# Altium PCB NIXIEclockhis.PcbDoc (part 2 of 3)
Units mil, origin at the board's own origin, x right, y up, seen from the top; angles counter-clockwise.
Board outline 8475 x 2960 mil, 2 copper layers (Top Layer, Bottom Layer); 232 components, 292 nets, 854 pads, 247 vias.
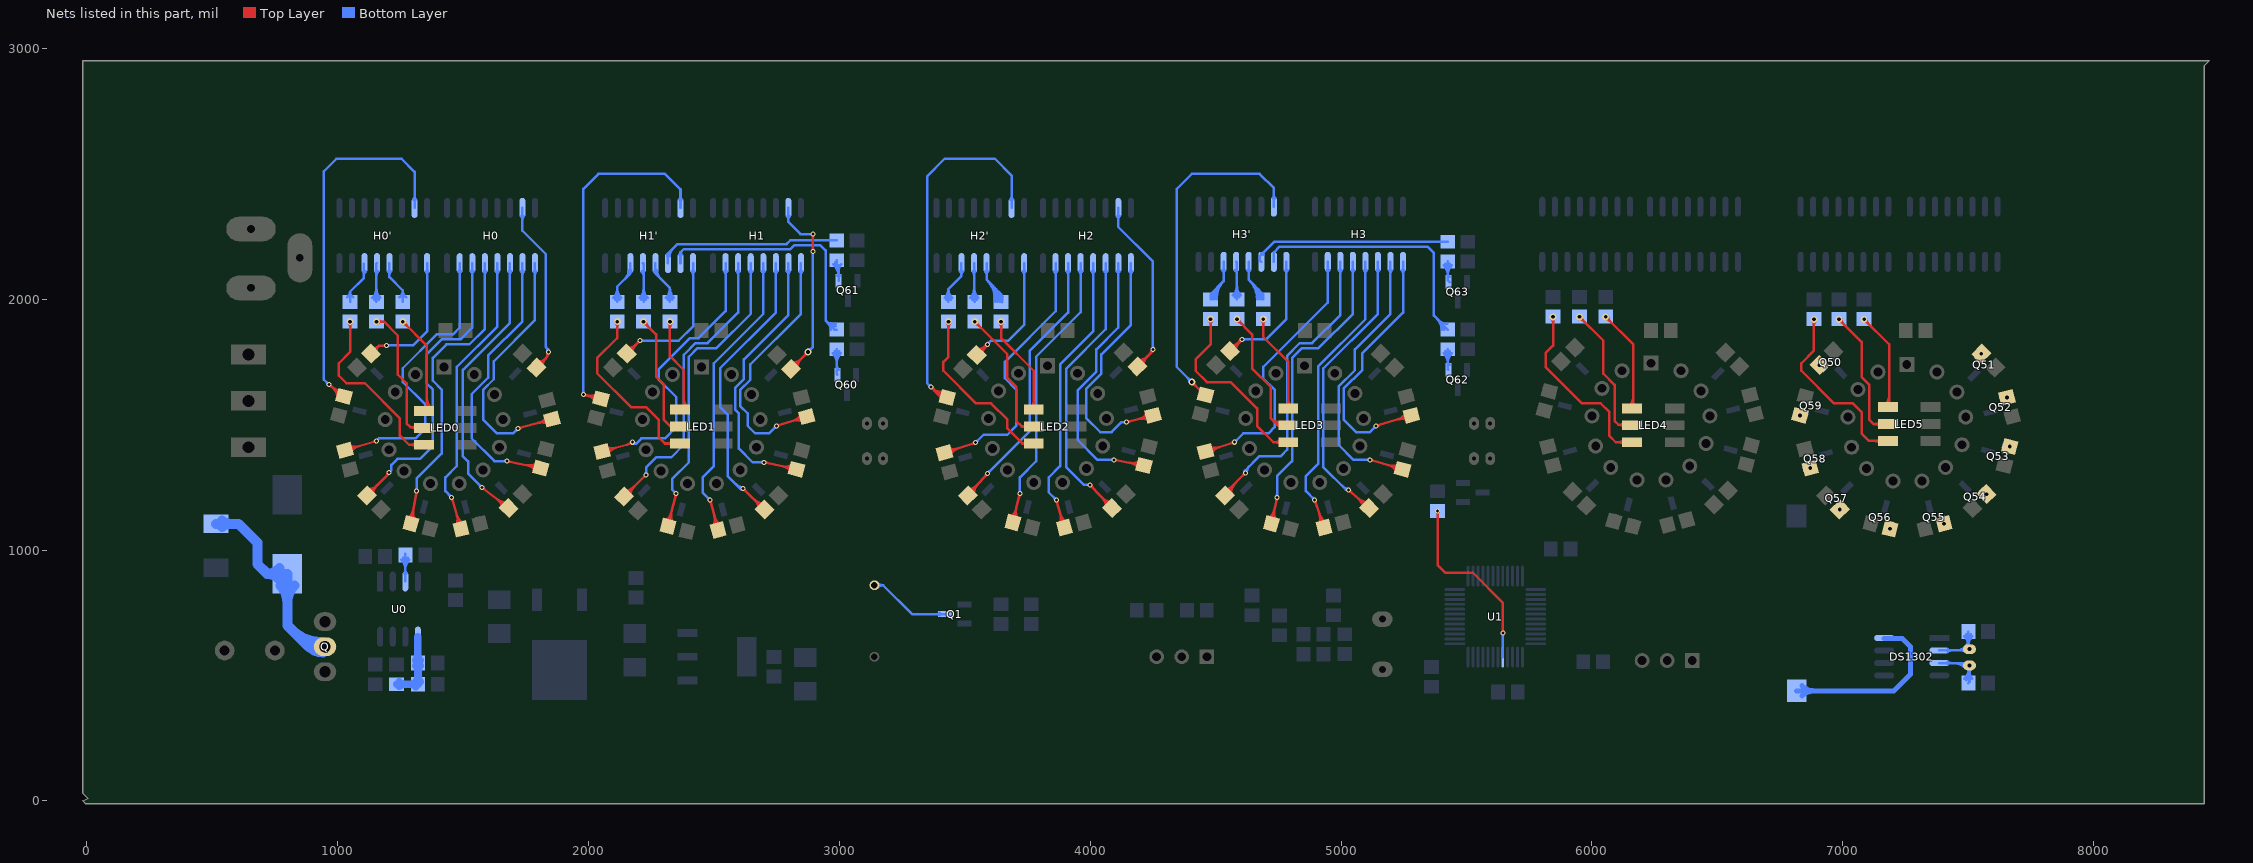
[diagram p2: the nets of this part, all layers, seen from the top]

## Via types
v1: diameter 20, hole 12, Top Layer to Bottom Layer, 132 vias
v2: diameter 28, hole 15, Top Layer to Bottom Layer, 84 vias
v3: diameter 30, hole 20, Top Layer to Bottom Layer, 23 vias
v4: diameter 118.11, hole 118.11, Top Layer to Bottom Layer, 4 vias
v5: diameter 50, hole 28, Top Layer to Bottom Layer, 2 vias
v6: diameter 59.06, hole 59.06, Top Layer to Bottom Layer, 2 vias

## Nets (pads, with @x,y where several pads share a name; then routed paths per layer and width w, separated by ;. In a path a pad name is that pad's centre, name@x,y a point inside that pad or via, vN(x,y) a via of type N, cw(c..) or ccw(c..) an arc to the next point about the centre after c; other vN are vias at no path point) (continued)
H5.0: Q50.2 R119.2
  other v2: 6907.16,1737.16
H5.1: Q51.2 R118.1
  other v2: 7552.16,1782.84
H5.2: Q52.2 R111.2
  other v2: 7654.81,1608.03
H5.3: Q53.2 R112.2
  other v2: 7665.19,1413.03
H5.4: Q54.2 R113.2
  other v2: 7572.84,1222.84
H5.5: Q55.2 R114.2
  other v2: 7403.03,1105.19
H5.6: Q56.2 R115.2
  other v2: 7188.03,1084.81
H5.7: Q57.2 R116.2
  other v2: 6987.84,1162.16
H5.8: Q58.2 R117.2
  other v2: 6870.19,1326.97
H5.9: Q59.2 R124.1
  other v2: 6829.81,1536.97
LED0.B: LED0.1 R51.2 | length 521.9
  Top Layer w10: v2@1260,1901.63 cw(c1260,1879.9) 1275.36,1895.27 cw(c1290.73,1910.63) v2@1269,1910.63 ; v2(1260,1910.63) 1355,1815.63 1355,1565 LED0.1@1345,1555 ; 1355,1589.69 ccw(c1399.38,1589.69) LED0.1@1368,1558.31 ; 1355,1613.83 ccw(c1423.52,1613.83) LED0.1@1375.07,1565.38
LED0.G: LED0.3 R53.2 | length 818.2
  Top Layer w10: v2@1043.64,1904.27 cw(c1028.27,1888.9) 1050,1888.9 cw(c1071.73,1888.9) v2@1056.36,1904.27 ; v2(1050,1910.63) 1050,1790 1005,1745 1005,1695 1035,1665 1108.64,1665 1248.64,1525 1248.64,1456.36 1285,1420 LED0.3@1345,1420 ; LED0.3@1314.93,1409.62 ccw(c1289.86,1384.55) 1289.86,1420 ccw(c1289.86,1455.45) LED0.3@1314.93,1430.38
LED0.R: LED0.2 R52.2 | length 628.9
  Top Layer w10: v2(1155,1910.63) 1184.37,1910.63 1240,1855 1240,1700 1275,1665 1275,1505 1290,1490 ; v2@1161.36,1904.27 cw(c1176.73,1888.9) 1176.73,1910.63 cw(c1176.73,1932.36) v2@1161.36,1916.99 ; 1295.9,1490 ccw(c1295.9,1516.92) LED0.2@1314.93,1497.88 ; LED0.2@1313.76,1478.44 ccw(c1290,1459.81) 1290,1490 ; LED0.2@1342.5,1490 1290,1490
LED1.B: LED1.1 R66.2 | length 490.9
  Top Layer w10: v2@2318.64,1904.27 cw(c2303.27,1888.9) 2325,1888.9 cw(c2346.73,1888.9) v2@2331.36,1904.27 ; v2(2325,1910.63) 2325,1773.64 2380,1718.64 2380,1575 LED1.1@2365,1560 ; LED1.1@2374.3,1570.38 ccw(c2360.54,1584.14) 2380,1584.14 ; 2380,1582.62 ccw(c2407.31,1582.62) LED1.1@2388,1563.31 ; 2380,1606.76 ccw(c2431.45,1606.76) LED1.1@2395.07,1570.38
LED1.G: LED1.3 R68.2 | length 816.5
  Top Layer w10: v2@2108.64,1904.27 cw(c2093.27,1888.9) 2115,1888.9 cw(c2136.73,1888.9) v2@2121.36,1904.27 ; v2@2114.37,1910 v2(2115,1910.63) 2115,1845 2035,1765 2035,1705 2170,1570 2230,1570 2280,1520 2280,1450 2305,1425 LED1.3@2365,1425 ; LED1.3@2334.93,1414.62 ccw(c2309.86,1389.55) 2309.86,1425 ccw(c2309.86,1460.45) LED1.3@2334.93,1435.38
LED1.R: LED1.2 R67.2 | length 534.3
  Top Layer w10: v2@2220,1901.63 cw(c2220,1881.42) 2234.29,1895.71 ; v2(2220,1910.63) 2220,1910 2270,1860 2270,1691.36 2300,1661.36 2300,1520 2327.5,1492.5 LED1.2@2365,1492.5 ; v2@2229,1910.63 ccw(c2252.25,1910.63) 2235.81,1894.19
LED2.B: LED2.1 R79.2 | length 494.3
  Top Layer w10: v2@3638.64,1904.27 cw(c3623.27,1888.9) 3645,1888.9 cw(c3666.73,1888.9) v2@3651.36,1904.27 ; v2(3645,1910.63) 3645,1845 3775,1715 LED2.1@3775,1560 ; LED2.1@3764.62,1570.38 ccw(c3739.55,1595.45) 3775,1595.45 ccw(c3810.45,1595.45) LED2.1@3785.38,1570.38
LED2.G: LED2.3 R81.2 | length 769.1
  Top Layer w10: v2@3428.64,1904.27 cw(c3413.27,1888.9) 3435,1888.9 cw(c3456.73,1888.9) v2@3441.36,1904.27 ; v2(3435,1910.63) 3435,1770 3415,1750 3415,1715 3545,1585 3605,1585 3670,1520 3670,1485 3730,1425 ; LED2.3@3742.57,1417.71 ccw(c3730,1410.52) 3730,1425 ; LED2.3@3742.57,1432.29 cw(c3730,1439.48) 3730,1425 ; LED2.3@3775,1425 3730,1425
LED2.R: LED2.2 R80.2 | length 614.3
  Top Layer w10: v2@3540,1901.63 cw(c3540,1879.9) 3555.36,1895.27 cw(c3570.73,1910.63) v2@3549,1910.63 ; v2(3540,1910.63) 3670,1780.63 3670,1686.36 3705,1651.36 3705,1515 3727.5,1492.5 ; LED2.2@3743.19,1484.22 ccw(c3727.5,1473.5) 3727.5,1492.5 ; LED2.2@3743.19,1500.78 cw(c3727.5,1511.5) 3727.5,1492.5 ; LED2.2@3775,1492.5 3727.5,1492.5
LED3.B: LED3.1 R94.2 | length 486.9
  Top Layer w10: v2@4683.64,1914.27 cw(c4668.27,1898.9) 4690,1898.9 cw(c4711.73,1898.9) v2@4696.36,1914.27 ; v2(4690,1920.63) 4690,1850 4790,1750 LED3.1@4790,1565 ; LED3.1@4779.62,1575.38 ccw(c4754.55,1600.45) 4790,1600.45 ccw(c4825.45,1600.45) LED3.1@4800.38,1575.38
LED3.G: LED3.3 R96.2 | length 849.4
  Top Layer w10: v2@4473.64,1914.27 cw(c4458.27,1898.9) 4480,1898.9 cw(c4501.73,1898.9) v2@4486.36,1914.27 ; v2(4480,1920.63) 4480,1820 4420,1760 4420,1715 4465,1670 4560,1670 4665,1565 4665,1495 4730,1430 LED3.3@4790,1430 ; LED3.3@4759.93,1419.62 ccw(c4734.86,1394.55) 4734.86,1430 ccw(c4734.86,1465.45) LED3.3@4759.93,1440.38
LED3.R: LED3.2 R95.2 | length 710
  Top Layer w10: v2@4585,1911.63 cw(c4585,1889.9) 4600.36,1905.27 cw(c4615.73,1920.63) v2@4594,1920.63 ; v2(4585,1920.63) 4645.63,1860 4645.63,1724.37 4720,1650 4720,1525 ; 4732.63,1512.37 ccw(c4760.13,1539.88) LED3.2@4769.22,1502.06 ; 4745.25,1499.75 ccw(c4765.02,1519.52) LED3.2@4771.56,1492.33 ; LED3.2@4756.95,1491.42 ccw(c4747.5,1487.12) 4747.5,1497.5 ; LED3.2@4756.95,1503.58 cw(c4747.5,1507.88) 4747.5,1497.5 ; LED3.2@4766.88,1511.78 cw(c4755.24,1560.24) 4720,1525 ; LED3.2@4790,1497.5 4747.5,1497.5 ; 4720,1525 4747.5,1497.5
LED4.B: LED4.1 R107.2 | length 524.7
  Top Layer w10: v2@6055,1921 cw(c6055,1899.27) 6070.36,1914.64 cw(c6085.73,1930) v2@6064,1930 ; v2(6055,1930) 6165,1820 6165,1570 LED4.1@6160,1565 ; LED4.1@6149.62,1575.38 ccw(c6112.48,1612.52) 6165,1612.52 ; LED4.1@6156.69,1568.31 ccw(c6136.62,1588.38) 6165,1588.38 ccw(c6183.38,1588.38) LED4.1@6170.38,1575.38
LED4.G: LED4.3 R109.2 | length 827.2
  Top Layer w10: v2@5838.64,1923.64 cw(c5823.27,1908.27) 5845,1908.27 cw(c5866.73,1908.27) v2@5851.36,1923.64 ; v2(5845,1930) 5845,1815 5815,1785 5815,1730 5960,1585 6035,1585 6070,1550 6070,1455 6095,1430 LED4.3@6160,1430 ; LED4.3@6129.93,1419.62 ccw(c6104.86,1394.55) 6104.86,1430 ccw(c6104.86,1465.45) LED4.3@6129.93,1440.38
LED4.R: LED4.2 R108.2 | length 632.9
  Top Layer w10: v2@5950,1921 cw(c5950,1899.27) 5965.36,1914.64 cw(c5980.73,1930) v2@5959,1930 ; v2(5950,1930) 6045,1835 6045,1703.64 6090,1658.64 6090,1515 6105,1500 ; 6110.9,1500 ccw(c6110.9,1526.92) LED4.2@6129.93,1507.88 ; LED4.2@6128.76,1488.44 ccw(c6105,1469.81) 6105,1500 ; LED4.2@6160,1497.5 6157.5,1500 6105,1500
LED5.B: LED5.1 R121.2 | length 505.6
  Top Layer w10: v2@7085,1911 cw(c7085,1889.27) 7100.36,1904.64 cw(c7115.73,1920) v2@7094,1920 ; v2(7085,1920) 7185,1820 7185,1575 LED5.1@7180,1570 ; LED5.1@7169.62,1580.38 ccw(c7132.48,1617.52) 7185,1617.52 ; LED5.1@7176.69,1573.31 ccw(c7156.62,1593.38) 7185,1593.38 ccw(c7203.38,1593.38) LED5.1@7190.38,1580.38
LED5.G: LED5.3 R123.2 | length 826.3
  Top Layer w10: v2@6878.64,1913.64 cw(c6863.27,1898.27) 6885,1898.27 cw(c6906.73,1898.27) v2@6891.36,1913.64 ; v2(6885,1920) 6885,1795 6835,1745 6835,1715 6965,1585 7040,1585 7075,1550 7075,1465 7105,1435 LED5.3@7180,1435 ; LED5.3@7149.93,1424.62 ccw(c7124.86,1399.55) 7124.86,1435 ccw(c7124.86,1470.45) LED5.3@7149.93,1445.38
LED5.R: LED5.2 R122.2 | length 621.8
  Top Layer w10: v2@6985,1911 cw(c6985,1889.27) 7000.36,1904.64 cw(c7015.73,1920) v2@6994,1920 ; v2(6985,1920) 7075,1830 7075,1690 7105,1660 7105,1520 7122.5,1502.5 LED5.2@7180,1502.5 ; LED5.2@7149.93,1492.12 ccw(c7124.86,1467.05) 7124.86,1502.5 ccw(c7124.86,1537.95) LED5.2@7149.93,1512.88
LEDBREATH: R140.2 U1.41 | length 811.3
  Top Layer w10: v1@5381.46,1152.09 cw(c5372.93,1143.56) 5385,1143.56 cw(c5397.07,1143.56) v1@5388.54,1152.09 ; v1(5385,1155.63) 5385,940 5415,910 5525,910 5645,790 v1(5645,670) ; v1@5641.46,673.54 ccw(c5632.93,682.07) 5645,682.07 ccw(c5657.07,682.07) v1@5648.54,673.54
  Bottom Layer w10: v1@5641.46,666.46 cw(c5634.07,659.07) 5644.53,659.07 ; U1.41@5644.53,573.58 5644.53,669.53 v1(5645,670) ; 5644.53,656.79 cw(c5658.21,656.79) v1@5648.54,666.46
NEON.0: Q60.2 R64.2 | length 256.4
  Bottom Layer w10: R64.2@2974.05,1784.68 cw(c2935.54,1746.17) 2990,1746.17 cw(c3044.46,1746.17) R64.2@3005.95,1784.68 ; R64.2@2981.12,1791.75 cw(c2959.68,1770.31) 2990,1770.31 cw(c3020.32,1770.31) R64.2@2998.88,1791.75 ; 2990,1736.85 ccw(c3015.31,1736.85) Q60.2@2997.41,1718.95 ; R64.2@2990,1800.63 2990,1700.98 Q60.2@2992.6,1698.39
NEON.1: Q61.2 R65.2 | length 256.4
  Bottom Layer w10: R65.2@2976.02,2139.68 cw(c2923.91,2087.58) Q61.2@2997.6,2087.58 ; R65.2@2983.09,2146.75 cw(c2948.06,2111.72) 2997.6,2111.72 ; R65.2@2990,2155.63 2990,2135 2997.6,2127.4 Q61.2@2997.6,2073.39 ; R65.2@2991.5,2133.08 cw(c2991.37,2126.85) 2997.6,2126.85 cw(c3007.97,2126.85) R65.2@3002.93,2135.91 ; Q61.2@2992.78,2093.95 ccw(c2981.16,2105.58) 2997.6,2105.58 ccw(c3014.04,2105.58) Q61.2@3002.41,2093.95 ; 2997.6,2114.76 cw(c3032.84,2114.76) R65.2@3007.92,2139.68
NEON.2: Q62.2 R92.2 | length 236.4
  Bottom Layer w10: R92.2@5409.05,1784.68 cw(c5370.54,1746.17) 5425,1746.17 cw(c5479.46,1746.17) R92.2@5440.95,1784.68 ; R92.2@5416.12,1791.75 cw(c5394.68,1770.31) 5425,1770.31 cw(c5455.32,1770.31) R92.2@5433.88,1791.75 ; 5425,1756.85 ccw(c5450.31,1756.85) Q62.2@5432.41,1738.95 ; R92.2@5425,1800.63 5425,1720.98 Q62.2@5427.6,1718.39
NEON.3: Q63.2 R93.2 | length 238.4
  Bottom Layer w10: R93.2@5409.05,2134.68 cw(c5370.54,2096.17) 5425,2096.17 cw(c5479.46,2096.17) R93.2@5440.95,2134.68 ; R93.2@5416.12,2141.75 cw(c5394.68,2120.31) 5425,2120.31 cw(c5455.32,2120.31) R93.2@5433.88,2141.75 ; 5425,2106.85 ccw(c5450.31,2106.85) Q63.2@5432.41,2088.95 ; R93.2@5425,2150.63 5425,2075.98 Q63.2@5432.6,2068.39
NetBEEP_2: BEEP.2 Q1.1 | length 409.7
  Bottom Layer w10: BEEP.2@3140,860 3175,860 ; BEEP.2@3150.48,849.71 cw(c3175,825.64) 3175,860 ; BEEP.2@3150.48,870.29 ccw(c3175,894.36) 3175,860 ; Q1.1@3401.05,740.18 ccw(c3389.42,728.56) 3389.42,745 ccw(c3389.42,761.44) Q1.1@3401.05,749.82 ; Q1.1@3421.61,745 3290,745 3175,860
NetBT0_1: BT0.1 DS1302.8 | length 821.3
  Bottom Layer w20: BT0.1@6815.98,439.21 7204.21,439.21 7270,505 7270,615 7237,648 DS1302.8@7165,648 ; BT0.1@6836.75,418.44 cw(c6886.89,368.31) 6886.89,439.21 cw(c6886.89,510.12) BT0.1@6836.75,459.98
NetC11_1: C11.1 U0.3 | length 270
  Bottom Layer w10: C11.1@1254.68,962.08 cw(c1217.69,925.09) 1270,925.09 ; C11.1@1261.75,969.15 cw(c1241.83,949.23) 1270,949.23 ; U0.3@1265.05,907.95 ccw(c1253.1,919.9) 1270,919.9 ccw(c1286.9,919.9) U0.3@1274.95,907.95 ; U0.3@1270,875 1270,984.37 C11.1@1270.63,985 ; 1270,922.05 cw(c1326.61,922.05) C11.1@1286.58,962.08 ; 1270,946.19 cw(c1302.47,946.19) C11.1@1279.51,969.15
NetC12_2: C12.2 R11.1 R12.2 U0.5 | length 512.5
  Bottom Layer w30: R11.1@1235.63,465 R12.2@1320.63,465 C12.2@1320.63,550 ; R11.1@1245.85,456.75 cw(c1265.77,436.83) 1265.77,465 ; R11.1@1245.85,474.51 ccw(c1268.81,497.47) 1268.81,465 ; R12.2@1311.75,456.12 ccw(c1290.31,434.68) 1290.31,465 ccw(c1290.31,495.32) R12.2@1311.75,473.88 ; R12.2@1311.75,475.85 ccw(c1290.31,497.29) 1320.63,497.29 ccw(c1350.95,497.29) R12.2@1329.51,475.85 ; C12.2@1311.75,539.15 cw(c1290.31,517.71) 1320.63,517.71 cw(c1350.95,517.71) C12.2@1329.51,539.15 ; C12.2@1311.75,560.85 ccw(c1291.83,580.77) 1320,580.77 ; C12.2@1320,550.63 U0.5@1320,655 ; 1320,583.81 ccw(c1352.47,583.81) C12.2@1329.51,560.85
NetC60_1: C60.1 DS1302.3 Y2.2 | length 487.6
  Bottom Layer w10: DS1302.3@7385,550 7495.43,550 Y2.2@7505,540.43 7505,474.37 C60.1@7500.63,470 ; DS1302.3@7417.95,545.05 cw(c7429.9,533.1) 7429.9,550 cw(c7429.9,566.9) DS1302.3@7417.95,554.95 ; 7440.55,550 cw(c7440.55,481.88) Y2.2@7488.71,530.05 ; 7464.69,550 cw(c7464.69,506.03) Y2.2@7495.78,537.12 ; C60.1@7484.68,487.92 ccw(c7435.62,536.98) Y2.2@7505,536.98 ; C60.1@7491.75,480.85 ccw(c7459.76,512.84) 7505,512.84 ; Y2.2@7494.62,530.05 cw(c7469.55,504.98) 7505,504.98 cw(c7540.45,504.98) Y2.2@7515.38,530.05 ; 7505,515.88 ccw(c7544.54,515.88) C60.1@7516.58,487.92
NetC61_1: C61.1 DS1302.2 Y2.1 | length 484
  Bottom Layer w10: DS1302.2@7385,600 Y2.1@7505,600 ; DS1302.2@7417.95,595.05 cw(c7429.9,583.1) 7429.9,600 cw(c7429.9,616.9) DS1302.2@7417.95,604.95 ; 7451.57,600 ccw(c7451.57,652.52) 7488.71,615.38 ccw(c7459.93,644.16) 7500.63,644.16 ; C61.1@7484.68,657.08 cw(c7446.17,618.57) 7500.63,618.57 cw(c7555.09,618.57) C61.1@7516.58,657.08 ; Y2.1@7488.71,594.62 ccw(c7475.71,581.62) 7475.71,600 ccw(c7475.71,628.38) Y2.1@7495.78,608.31 ; C61.1@7491.75,664.15 cw(c7470.31,642.71) 7500.63,642.71 cw(c7530.95,642.71) C61.1@7509.51,664.15 ; Y2.1@7500.63,604.37 C61.1@7500.63,675 ; 7500.63,636.75 ccw(c7530.84,636.75) Y2.1@7509.48,615.38
NetD0_3: D0.1 L0.1 Q.2 | length 1411.8
  Bottom Layer w40: D0.1@515,1105 605,1105 680,1030 680,945 719.5,905.5 ; D0.1@539.87,1092.63 cw(c569.75,1062.75) 569.75,1105 cw(c569.75,1147.25) D0.1@539.87,1117.37 ; L0.1@769.18,881.36 ccw(c719.5,842.31) 719.5,905.5 ; L0.1@769.18,929.64 cw(c719.5,968.69) 719.5,905.5 ; L0.1@772.27,858.2 cw(c705.6,791.53) 799.88,791.53 cw(c894.17,791.53) L0.1@827.5,858.2 ; 814.47,685.53 ccw(c942.5,813.57) Q.2@942.5,632.5 ; 882.75,617.25 ccw(c942.5,677) Q.2@942.5,592.5 ; Q.2@930.13,602.63 ccw(c900.25,572.75) 900.25,615 ccw(c900.25,657.25) Q.2@930.13,627.37 ; Q.2@950,615 885,615 799.88,700.12 L0.1@799.88,905.5 719.5,905.5
NetH0'_1: H0'.1 R48.1 | length 657.4
  Top Layer w10: R48.1@1132.84,1782.84 1165,1815 ; R48.1@1135.89,1805.19 ccw(c1140.56,1839.44) 1165,1815 ; R48.1@1155.19,1785.89 cw(c1189.44,1790.56) 1165,1815 ; v1@1191.46,1811.46 ccw(c1182.93,1802.93) 1182.93,1815 ccw(c1182.93,1827.07) v1@1191.46,1818.54 ; v1(1195,1815) 1165,1815
  Bottom Layer w10: v1@1195,1817.5 1302.5,1817.5 1357,1872 H0'.1@1357,2144 ; v1@1198.54,1811.46 cw(c1213.11,1796.89) 1213.11,1817.5 ; H0'.1@1352.05,2111.05 cw(c1340.1,2099.1) 1357,2099.1 cw(c1373.9,2099.1) H0'.1@1361.95,2111.05
NetH0'_4: H0'.4 R51.1 | length 267.2
  Bottom Layer w10: H0'.4@1202.05,2111.05 cw(c1190.1,2099.1) 1207,2099.1 cw(c1223.9,2099.1) H0'.4@1211.95,2111.05 ; H0'.4@1207,2144 1207,2088 1260,2035 ; R51.1@1246.3,2007.3 ccw(c1225.14,2035) 1260,2035 ; R51.1@1260,1989.37 1260,2035 ; R51.1@1273.7,2007.3 cw(c1294.86,2035) 1260,2035
NetH0'_5: H0'.5 R52.1 | length 315.2
  Bottom Layer w10: R52.1@1139.05,2005.32 ccw(c1100.54,2043.83) 1155,2043.83 ccw(c1209.46,2043.83) R52.1@1170.95,2005.32 ; R52.1@1146.12,1998.25 ccw(c1124.68,2019.69) 1155,2019.69 ccw(c1185.32,2019.69) R52.1@1163.88,1998.25 ; H0'.5@1152.05,2111.05 cw(c1144.93,2103.93) 1155,2103.93 ; R52.1@1155,1989.37 1155,2142 H0'.5@1157,2144 ; 1155,2094.27 cw(c1178.73,2094.27) H0'.5@1161.95,2111.05
NetH0'_6: H0'.6 R53.1 | length 253.3
  Bottom Layer w10: R53.1@1038.07,2008.52 ccw(c1024.69,2030) 1050,2030 ; R53.1@1050,1989.37 1050,2030 ; R53.1@1061.93,2008.52 cw(c1075.31,2030) 1050,2030 ; H0'.6@1102.05,2111.05 cw(c1094.93,2103.93) 1105,2103.93 ; 1105,2094.27 cw(c1128.73,2094.27) H0'.6@1111.95,2111.05 ; H0'.6@1105,2142 1105,2085 1050,2030
NetH0'_15: H0'.15 R54.2 | length 1680.5
  Top Layer w10: v1(965,1660) R54.2@1025.19,1613.03 ; v1@965.61,1655.04 cw(c967.09,1643.06) 974.52,1652.57 cw(c981.94,1662.09) v1@969.96,1660.61 ; 979.36,1648.79 cw(c944.24,1603.79) R54.2@1000.9,1610.78 ; 982.29,1646.51 ccw(c1014.18,1687.38) R54.2@1020.53,1635.93 ; 998.4,1633.94 cw(c978.13,1607.97) R54.2@1010.82,1612 ; R54.2@1001.32,1631.66 ccw(c1018.36,1653.49) R54.2@1021.75,1626
  Bottom Layer w10: v1@960,1660 ccw(c947.93,1660) 956.46,1668.54 ccw(c965,1677.07) v1@965,1665 ; v1(965,1660) 945,1680 945,2510 995,2560 1255,2560 1307,2508 H0'.15@1307,2364 ; H0'.15@1302.05,2396.95 ccw(c1290.1,2408.9) 1307,2408.9 ccw(c1323.9,2408.9) H0'.15@1311.95,2396.95
NetH0_1: H0.1 R40.1 | length 1218.6
  Top Layer w10: v1(1720,1485) R40.1@1855.19,1521.97 ; v1@1722.48,1489.34 ccw(c1728.46,1499.83) 1731.64,1488.18 ccw(c1734.83,1476.54) v1@1724.34,1482.52 ; 1800.73,1507.08 ccw(c1786.36,1559.65) R40.1@1833.69,1532.64 ; 1800.78,1507.09 cw(c1815.14,1454.59) R40.1@1842.11,1501.87 ; 1824.02,1513.45 ccw(c1816.01,1542.73) R40.1@1842.38,1527.69 ; 1824.07,1513.46 cw(c1832.06,1484.25) R40.1@1847.07,1510.55
  Bottom Layer w10: v1@1715,1485 cw(c1702.93,1485) 1711.46,1476.46 cw(c1720,1467.93) v1@1720,1480 ; v1(1720,1485) 1700,1465 1635,1465 1580,1520 1580,1638.64 1622.5,1681.14 1622.5,1752.5 1787,1917 H0.1@1787,2144 ; H0.1@1782.05,2111.05 cw(c1770.1,2099.1) 1787,2099.1 cw(c1803.9,2099.1) H0.1@1791.95,2111.05
NetH0_2: H0.2 R41.1 | length 1295.3
  Top Layer w10: v1(1675,1355) R41.1@1809.81,1326.97 ; v1@1677.74,1350.82 cw(c1684.36,1340.72) 1686.82,1352.54 cw(c1689.28,1364.36) v1@1679.18,1357.74 ; 1754.3,1338.51 ccw(c1765.46,1392.21) R41.1@1795.54,1346.35 ; 1754.83,1338.4 cw(c1743.82,1285.45) R41.1@1789.04,1315.11 ; 1777.94,1333.6 ccw(c1784.19,1363.66) R41.1@1801.02,1337.98 ; 1778.47,1333.49 cw(c1772.37,1304.18) R41.1@1797.41,1320.59
  Bottom Layer w10: v1@1671.46,1351.46 ccw(c1662.93,1342.93) 1662.93,1355 ccw(c1662.93,1367.07) v1@1671.46,1358.54 ; v1(1675,1355) 1625,1355 1535,1445 1535,1621.92 1600,1686.92 1600,1775 1737,1912 H0.2@1737,2144 ; H0.2@1732.05,2111.05 cw(c1720.1,2099.1) 1737,2099.1 cw(c1753.9,2099.1) H0.2@1741.95,2111.05
NetH0_3: H0.3 R42.1 | length 1335.6
  Top Layer w10: v1(1575,1250) R42.1@1682.16,1167.16 ; v1@1575.63,1245.04 cw(c1577.17,1233.07) 1584.55,1242.62 cw(c1591.93,1252.17) v1@1579.96,1250.63 ; 1637.05,1202.03 ccw(c1670.88,1245.8) R42.1@1677.9,1190.93 ; 1638,1201.3 cw(c1605.22,1158.88) R42.1@1658.39,1165.69 ; 1656.15,1187.27 ccw(c1675.22,1211.93) R42.1@1679.17,1181.01 ; 1657.11,1186.53 cw(c1639.08,1163.22) R42.1@1668.31,1166.96
  Bottom Layer w10: v1@1570,1250 ccw(c1557.93,1250) 1566.46,1258.54 ccw(c1575,1267.07) v1@1575,1255 ; v1(1575,1250) 1520,1305 1520,1353.64 1500,1373.64 1500,1718.64 1687,1905.64 H0.3@1687,2144 ; H0.3@1682.05,2111.05 cw(c1670.1,2099.1) 1687,2099.1 cw(c1703.9,2099.1) H0.3@1691.95,2111.05
NetH0_4: H0.4 R43.1 | length 1358.3
  Top Layer w10: v1@1452.61,1205.61 cw(c1446.84,1195) 1458.42,1198.42 cw(c1470,1201.84) v1@1459.39,1207.61 ; v1(1455,1210) R43.1@1491.97,1084.81 ; R43.1@1471.65,1097.49 ccw(c1423.95,1123.44) 1476.02,1138.81 ; 1475.95,1139.05 ccw(c1528.35,1154.52) R43.1@1502.24,1106.53 ; R43.1@1480.43,1092.71 ccw(c1453.95,1107.12) 1482.86,1115.66 ; 1482.79,1115.89 ccw(c1512.03,1124.53) R43.1@1497.46,1097.74
  Bottom Layer w10: v1@1450,1210 ccw(c1437.93,1210) 1446.46,1218.54 ccw(c1455,1227.07) v1@1455,1215 ; v1(1455,1210) 1430,1235 1430,1290 1475,1335 1475,1730 1637,1892 H0.4@1637,2144 ; H0.4@1632.05,2111.05 cw(c1620.1,2099.1) 1637,2099.1 cw(c1653.9,2099.1) H0.4@1641.95,2111.05
NetH0_5: H0.5 R44.1 | length 1433.6
  Top Layer w10: R44.1@1279.56,1125.58 ccw(c1248.7,1169.75) 1301.76,1160.34 ; R44.1@1285.29,1117.39 ccw(c1268.25,1141.77) 1297.54,1136.57 ; R44.1@1291.97,1105.19 v1(1315,1235) ; 1297.68,1137.38 ccw(c1328.11,1131.98) R44.1@1302.78,1114.28 ; 1301.9,1161.15 ccw(c1356.09,1151.53) R44.1@1310.97,1120.01 ; v1@1310.9,1232.14 cw(c1301.01,1225.22) 1312.89,1223.11 cw(c1324.78,1221.01) v1@1317.86,1230.9
  Bottom Layer w10: v1@1311.46,1238.54 ccw(c1302.93,1247.07) 1315,1247.07 ccw(c1327.07,1247.07) v1@1318.54,1238.54 ; v1(1315,1235) 1315,1285 1415,1385 1415,1640 1380,1675 1380,1766.21 1433.79,1820 1525,1820 1587,1882 H0.5@1587,2144 ; H0.5@1582.05,2111.05 cw(c1570.1,2099.1) 1587,2099.1 cw(c1603.9,2099.1) H0.5@1591.95,2111.05
NetH0_6: H0.6 R45.1 | length 1394.8
  Top Layer w10: R45.1@1117.16,1217.84 1205,1305.68 v1(1205,1310) ; R45.1@1118.55,1231.79 ccw(c1118.55,1262.11) 1139.99,1240.67 ccw(c1161.43,1219.23) R45.1@1131.11,1219.23 ; R45.1@1118.55,1241.79 ccw(c1118.55,1296.25) 1157.06,1257.74 ccw(c1195.57,1219.23) R45.1@1141.11,1219.23 ; 1193.41,1294.09 ccw(c1177.49,1310) v1@1200,1310
  Bottom Layer w10: v1(1205,1310) 1215,1320 1215,1340 1238.64,1363.64 1328.64,1363.64 1380,1415 1380,1640 1355,1665 1355,1780 1415,1840 1490,1840 1537,1887 H0.6@1537,2144 ; H0.6@1532.05,2111.05 cw(c1520.1,2099.1) 1537,2099.1 cw(c1553.9,2099.1) H0.6@1541.95,2111.05
NetH0_7: H0.7 R46.1 | length 1353.3
  Top Layer w10: R46.1@1029.81,1398.03 v1(1155,1435) ; R46.1@1037.71,1409.57 ccw(c1052.12,1436.05) 1060.66,1407.14 ; R46.1@1042.49,1418.35 ccw(c1068.44,1466.05) 1083.81,1413.98 ; R46.1@1042.74,1392.54 cw(c1069.53,1377.97) 1060.89,1407.21 ; R46.1@1051.53,1387.76 cw(c1099.52,1361.65) 1084.05,1414.05 ; v1@1150.61,1437.39 cw(c1140,1443.16) 1143.42,1431.58 cw(c1146.84,1420) v1@1152.61,1430.61
  Bottom Layer w10: v1(1155,1435) 1165,1445 1310,1445 1350,1485 1350,1580 1260,1670 1260,1725 1395,1860 1460,1860 1487,1887 H0.7@1487,2144 ; H0.7@1482.05,2111.05 cw(c1470.1,2099.1) 1487,2099.1 cw(c1503.9,2099.1) H0.7@1491.95,2111.05
NetH0_15: H0.15 R47.2 | length 835.8
  Top Layer w10: R47.2@1792.84,1727.16 1828.91,1763.24 ; R47.2@1795.96,1751.05 ccw(c1799.19,1792.96) 1828.91,1763.23 ; R47.2@1816.72,1730.28 cw(c1858.64,1733.51) 1828.91,1763.23 ; v1@1835.67,1787.5 cw(c1825.22,1781.46) 1836.88,1778.34 cw(c1848.54,1775.22) v1@1842.5,1785.67 ; v1(1840,1790) cw(c1802.15,1790) 1828.91,1763.24
  Bottom Layer w10: H0.15@1732.05,2331.05 cw(c1720.1,2319.1) 1737,2319.1 cw(c1753.9,2319.1) H0.15@1741.95,2331.05 ; H0.15@1737,2364 1737,2273 1830,2180 1830,1810 ; v1@1835.15,1791.23 ccw(c1816.09,1796.09) 1830,1810 ; v1(1840,1790) 1840,1800 1830,1810
NetH1'_1: H1'.1 R63.1 | length 759
  Top Layer w10: R63.1@2152.84,1782.84 v1(2205,1835) ; R63.1@2152.84,1795.4 ccw(c2152.84,1825.72) 2174.28,1804.28 ccw(c2195.72,1782.84) R63.1@2165.4,1782.84 ; R63.1@2152.84,1805.4 ccw(c2152.84,1859.86) 2191.35,1821.35 ccw(c2229.86,1782.84) R63.1@2175.4,1782.84 ; v1@2200,1835 cw(c2187.93,1835) 2196.46,1826.46 cw(c2205,1817.93) v1@2205,1830
  Bottom Layer w10: v1(2205,1835) 2360,1835 2417,1892 H1'.1@2417,2144 ; v1@2208.54,1831.46 cw(c2217.07,1822.93) 2217.07,1835 cw(c2217.07,1847.07) v1@2208.54,1838.54 ; H1'.1@2412.05,2111.05 cw(c2400.1,2099.1) 2417,2099.1 cw(c2433.9,2099.1) H1'.1@2421.95,2111.05
NetH1'_2: H1'.2 R64.1 | length 1104.5
  Bottom Layer w10: H1'.2@2362.5,2177.37 ccw(c2354.43,2187) 2367,2187 ; H1'.2@2367,2144 2367,2187 ; H1'.2@2371.5,2177.37 cw(c2379.57,2187) 2367,2187 ; 2954.75,1905.25 cw(c2928.88,1879.37) R64.1@2965.47,1879.37 ; 2959.15,1900.85 ccw(c2981.76,1923.45) R64.1@2986.26,1891.8 ; R64.1@2984.85,1901.7 cw(c2978.23,1948.23) 2945,1915 ; R64.1@2990,1879.37 2980.63,1879.37 2945,1915 ; 2367,2187 2380,2200 2805,2200 2820,2215 2925,2215 2945,2195 2945,1915
NetH1'_3: H1'.3 R65.1 | length 778.7
  Bottom Layer w10: H1'.3@2314,2172 cw(c2330.9,2172) 2318.95,2183.95 ; H1'.3@2317,2144 2317,2182 2355,2220 2790,2220 2805,2235 2989.37,2235 R65.1@2990,2234.37 ; H1'.3@2324,2172 cw(c2365.04,2172) 2336.02,2201.02
NetH1'_4: H1'.4 R66.1 | length 385.6
  Bottom Layer w10: H1'.4@2263.15,2110.16 cw(c2258.43,2103) 2267,2103 ; H1'.4@2264,2116 ccw(c2288.14,2116) 2271.07,2098.93 ; H1'.4@2267,2144 2267,2103 ; H1'.4@2270.85,2110.16 ccw(c2275.57,2103) 2267,2103 ; H1'.4@2274,2116 ccw(c2322.28,2116) 2288.14,2081.86 ; R66.1@2309.05,2005.32 ccw(c2270.54,2043.83) 2325,2043.83 ccw(c2379.46,2043.83) R66.1@2340.95,2005.32 ; R66.1@2316.12,1998.25 ccw(c2294.68,2019.69) 2325,2019.69 ccw(c2355.32,2019.69) R66.1@2333.88,1998.25 ; R66.1@2325,1989.37 2325,2045 2267,2103
NetH1'_5: H1'.5 R67.1 | length 310.4
  Bottom Layer w10: R67.1@2204.05,2005.32 ccw(c2165.54,2043.83) 2220,2043.83 ccw(c2274.46,2043.83) R67.1@2235.95,2005.32 ; R67.1@2211.12,1998.25 ccw(c2189.68,2019.69) 2220,2019.69 ccw(c2250.32,2019.69) R67.1@2228.88,1998.25 ; H1'.5@2212.05,2111.05 cw(c2192.86,2091.86) 2220,2091.86 ; H1'.5@2217,2144 2220,2141 R67.1@2220,1989.37
NetH1'_6: H1'.6 R68.1 | length 389.5
  Bottom Layer w10: R68.1@2099.05,2005.32 ccw(c2060.54,2043.83) 2115,2043.83 ccw(c2169.46,2043.83) R68.1@2130.95,2005.32 ; R68.1@2106.12,1998.25 ccw(c2084.68,2019.69) 2115,2019.69 ccw(c2145.32,2019.69) R68.1@2123.88,1998.25 ; R68.1@2115,1989.37 2115,2050 2167,2102 ; 2145.15,2080.15 ccw(c2109.3,2116) H1'.6@2160,2116 ; 2162.22,2097.22 ccw(c2143.44,2116) H1'.6@2170,2116 ; H1'.6@2162.8,2110.4 cw(c2156.5,2102) 2167,2102 ; H1'.6@2167,2144 2167,2102 ; H1'.6@2171.2,2110.4 ccw(c2177.5,2102) 2167,2102
NetH1'_15: H1'.15 R69.2 | length 1601.4
  Top Layer w10: v1(1980,1620) R69.2@2050.19,1603.03 ; v1@1982.61,1615.73 cw(c1988.9,1605.43) 1991.73,1617.16 cw(c1994.57,1628.9) v1@1984.27,1622.61 ; 1995.23,1616.32 ccw(c2008.07,1669.42) R69.2@2036.53,1622.79 ; 1995.45,1616.26 cw(c1982.69,1563.49) R69.2@2029.03,1591.78 ; 2018.69,1610.64 ccw(c2025.86,1640.28) R69.2@2041.74,1614.26 ; 2018.92,1610.59 cw(c2011.83,1581.28) R69.2@2037.57,1596.99
  Bottom Layer w10: v1@1976.46,1623.54 ccw(c1967.93,1632.07) 1980,1632.07 ccw(c1992.07,1632.07) v1@1983.54,1623.54 ; v1(1980,1620) 1980,2440 2040,2500 2305,2500 2367,2438 H1'.15@2367,2364 ; H1'.15@2362.05,2396.95 ccw(c2350.1,2408.9) 2367,2408.9 ccw(c2383.9,2408.9) H1'.15@2371.95,2396.95
NetH1_1: H1.1 R55.1 | length 1224.9
  Top Layer w10: v1(2750,1495) R55.1@2870.19,1531.97 ; v1@2752.34,1499.42 ccw(c2757.99,1510.09) 2761.54,1498.55 ccw(c2765.09,1487.01) v1@2754.42,1492.66 ; 2816.09,1515.33 ccw(c2800,1567.62) R55.1@2848.35,1542.02 ; 2816.42,1515.43 cw(c2832.36,1463.61) R55.1@2857.73,1511.53 ; 2839.16,1522.43 ccw(c2830.18,1551.64) R55.1@2857.19,1537.34 ; 2839.5,1522.53 cw(c2848.34,1493.78) R55.1@2862.41,1520.36
  Bottom Layer w10: v1@2745,1495 cw(c2732.93,1495) 2741.46,1486.46 cw(c2750,1477.93) v1@2750,1490 ; v1(2750,1495) 2720,1465 2665,1465 2635,1495 2635,1545 2605,1575 2605,1638.64 2645,1678.64 2645,1740 2847,1942 H1.1@2847,2144 ; H1.1@2842.05,2111.05 cw(c2830.1,2099.1) 2847,2099.1 cw(c2863.9,2099.1) H1.1@2851.95,2111.05
NetH1_2: H1.2 R56.1 | length 1286.3
  Top Layer w10: v1(2700,1350) R56.1@2829.81,1321.97 ; v1@2702.71,1345.8 cw(c2709.25,1335.65) 2711.8,1347.45 cw(c2714.35,1359.25) v1@2704.2,1352.71 ; 2774.42,1333.93 ccw(c2785.99,1387.49) R56.1@2815.68,1341.44 ; 2774.88,1333.83 cw(c2763.46,1280.92) R56.1@2808.95,1310.26 ; 2798.02,1328.83 ccw(c2804.49,1358.79) R56.1@2821.1,1333.04 ; 2798.48,1328.74 cw(c2792.15,1299.42) R56.1@2817.35,1315.67
  Bottom Layer w10: v1@2696.46,1346.46 ccw(c2687.93,1337.93) 2687.93,1350 ccw(c2687.93,1362.07) v1@2696.46,1353.54 ; v1(2700,1350) 2655,1350 2600,1405 2600,1545 2585,1560 2585,1646.92 2620,1681.92 2620,1760 2797,1937 H1.2@2797,2144 ; H1.2@2792.05,2111.05 cw(c2780.1,2099.1) 2797,2099.1 cw(c2813.9,2099.1) H1.2@2801.95,2111.05
NetH1_3: H1.3 R57.1 | length 1394.4
  Top Layer w10: v1(2616.47,1245) R57.1@2702.16,1162.16 ; v1@2616.55,1240 cw(c2616.76,1227.93) 2625.15,1236.61 cw(c2633.54,1245.29) v1@2621.47,1245.08 ; 2661.53,1201.44 ccw(c2699.46,1240.68) R57.1@2700.39,1186.11 ; 2661.65,1201.33 cw(c2623.87,1162.25) R57.1@2678.21,1163.17 ; 2678.89,1184.66 ccw(c2700.04,1206.54) R57.1@2700.56,1176.11 ; 2679,1184.55 cw(c2658.01,1162.83) R57.1@2688.21,1163.34
  Bottom Layer w10: 2588.36,1261.64 ccw(c2616.47,1289.76) v1@2616.47,1250 ; 2605.43,1244.57 ccw(c2616.47,1255.61) v1@2616.47,1240 ; v1@2612.8,1241.6 ccw(c2605,1234.35) 2605,1245 ; v1@2612.8,1248.4 cw(c2605,1255.65) 2605,1245 ; v1(2616.47,1245) 2605,1245 ; H1.3@2742.05,2111.05 cw(c2730.1,2099.1) 2747,2099.1 cw(c2763.9,2099.1) H1.3@2751.95,2111.05 ; H1.3@2747,2144 2747,1947 2525,1725 2525,1570 2555,1540 2555,1295 2605,1245
NetH1_4: H1.4 R58.1 | length 1378.7
  Top Layer w10: v1@2482.49,1195.67 cw(c2476.44,1185.23) 2488.1,1188.33 cw(c2499.77,1191.44) v1@2489.33,1197.49 ; v1(2485,1200) R58.1@2516.97,1079.81 ; R58.1@2496.95,1093.03 ccw(c2449.82,1120.35) 2502.46,1134.35 ccw(c2555.09,1148.33) R58.1@2527.78,1101.23 ; R58.1@2505.6,1088.01 ccw(c2479.36,1103.22) 2508.67,1111.02 ccw(c2537.96,1118.8) R58.1@2522.76,1092.58
  Bottom Layer w10: v1@2480,1200 ccw(c2467.93,1200) 2476.46,1208.54 ccw(c2485,1217.07) v1@2485,1205 ; v1(2485,1200) 2455,1230 2455,1290 2500,1335 2500,1745 2697,1942 H1.4@2697,2144 ; H1.4@2692.05,2111.05 cw(c2680.1,2099.1) 2697,2099.1 cw(c2713.9,2099.1) H1.4@2701.95,2111.05
NetH1_5: H1.5 R59.1 | length 1430
  Top Layer w10: R59.1@2305.96,1116.48 ccw(c2278.17,1163.23) 2330.87,1149.82 ; R59.1@2311.06,1107.89 ccw(c2295.62,1133.88) 2324.92,1126.42 ; R59.1@2316.97,1095.19 v1(2350,1225) ; 2324.95,1126.54 ccw(c2354.41,1119.04) R59.1@2328.28,1103.51 ; 2330.9,1149.94 ccw(c2383.76,1136.49) R59.1@2336.87,1108.62 ; v1@2345.7,1222.45 cw(c2335.33,1216.28) 2347.02,1213.3 cw(c2358.72,1210.33) v1@2352.55,1220.7
  Bottom Layer w10: v1@2345,1225 ccw(c2332.93,1225) 2341.46,1233.54 ccw(c2350,1242.07) v1@2350,1230 ; v1(2350,1225) 2335,1240 2335,1285 2400,1350 2400,1770 2435,1805 2510,1805 2647,1942 H1.5@2647,2144 ; H1.5@2642.05,2111.05 cw(c2630.1,2099.1) 2647,2099.1 cw(c2663.9,2099.1) H1.5@2651.95,2111.05
NetH1_6: H1.6 R60.1 | length 1380.8
  Top Layer w10: R60.1@2142.16,1212.84 v1@2229.66,1300.34 ; R60.1@2143.55,1226.79 ccw(c2143.55,1257.11) 2164.99,1235.67 ccw(c2186.43,1214.23) R60.1@2156.11,1214.23 ; R60.1@2143.55,1236.79 ccw(c2143.55,1291.25) 2182.06,1252.74 ccw(c2220.57,1214.23) R60.1@2166.11,1214.23 ; 2220.31,1290.99 cw(c2230,1281.29) v1@2230,1295 ; 2221.94,1292.62 ccw(c2214.57,1300) v1@2225,1300
  Bottom Layer w10: v1@2226.46,1303.54 ccw(c2217.93,1312.07) 2230,1312.07 ccw(c2242.07,1312.07) v1@2233.54,1303.54 ; v1(2230,1300) 2230,1330 2270,1370 2330,1370 2380,1420 2380,1778.28 2426.72,1825 2475,1825 2597,1947 H1.6@2597,2144 ; H1.6@2592.05,2111.05 cw(c2580.1,2099.1) 2597,2099.1 cw(c2613.9,2099.1) H1.6@2601.95,2111.05
NetH1_7: H1.7 R61.1 | length 1327.3
  Top Layer w10: R61.1@2054.81,1393.03 2171.36,1425 2175,1428.64 v1(2175,1430) ; R61.1@2062.93,1404.45 ccw(c2077.91,1430.76) 2085.92,1401.56 ; R61.1@2067.63,1387.32 cw(c2094.01,1372.3) 2085.98,1401.58 ; R61.1@2067.88,1413.14 ccw(c2094.81,1460.43) 2109.2,1407.95 ; R61.1@2076.31,1382.37 cw(c2123.68,1355.4) 2109.26,1407.96 ; 2155.4,1420.62 ccw(c2148.72,1444.97) v1@2170.66,1432.47
  Bottom Layer w10: v1(2175,1430) 2175,1425 2191.36,1425 2211.36,1445 2305,1445 2350,1490 2350,1610 2280,1680 2280,1720 2405,1845 2439,1845 2547,1953 H1.7@2547,2144 ; H1.7@2542.05,2111.05 cw(c2530.1,2099.1) 2547,2099.1 cw(c2563.9,2099.1) H1.7@2551.95,2111.05
NetH1_15: H1.15 R62.2 | length 1013.7
  Top Layer w10: R62.2@2807.84,1722.16 2875,1789.32 v2(2875,1790) ; R62.2@2809.23,1736.11 ccw(c2809.23,1766.43) 2830.67,1744.99 ccw(c2852.11,1723.55) R62.2@2821.79,1723.55 ; R62.2@2809.23,1746.11 ccw(c2809.23,1800.57) 2847.74,1762.06 ccw(c2886.25,1723.55) R62.2@2831.79,1723.55 ; 2859.16,1773.48 ccw(c2842.64,1790) v2@2866,1790 ; 2860.79,1775.12 cw(c2875,1760.91) v2@2875,1781 ; v1@2891.46,2193.54 ccw(c2882.93,2202.07) 2895,2202.07 ccw(c2907.07,2202.07) v1@2898.54,2193.54 ; v1@2891.46,2256.46 cw(c2882.93,2247.93) 2895,2247.93 cw(c2907.07,2247.93) v1@2898.54,2256.46 ; v1(2895,2190) v1(2895,2260)
  Bottom Layer w10: H1.15@2792.05,2331.05 cw(c2780.1,2319.1) 2797,2319.1 cw(c2813.9,2319.1) H1.15@2801.95,2331.05 ; H1.15@2797,2364 2797,2308 2845,2260 v1(2895,2260) ; v2(2875,1790) 2895,1810 v1(2895,2190) ; v2@2875,1799 ccw(c2875,1820.73) 2890.36,1805.36 ccw(c2905.73,1790) v2@2884,1790
NetH2'_1: H2'.1 R78.1 | length 708.7
  Top Layer w10: R78.1@3547.84,1777.84 v1(3590,1820) ; R78.1@3547.84,1790.4 ccw(c3547.84,1820.72) 3569.28,1799.28 ccw(c3590.72,1777.84) R78.1@3560.4,1777.84 ; R78.1@3547.84,1800.4 ccw(c3547.84,1854.86) 3586.35,1816.35 ccw(c3624.86,1777.84) R78.1@3570.4,1777.84 ; 3577.42,1811.19 ccw(c3569.1,1825.6) v1@3585.17,1821.29 ; 3581.19,1807.42 cw(c3595.6,1799.1) v1@3591.29,1815.17 ; v1@3585,1820 cw(c3572.93,1820) 3581.46,1811.46 cw(c3590,1802.93) v1@3590,1815
  Bottom Layer w10: v1(3590,1820) 3605,1835 3674,1835 3737,1898 H2'.1@3737,2144 ; v1@3590,1825 ccw(c3590,1837.07) 3598.54,1828.54 ccw(c3607.07,1820) v1@3595,1820 ; H2'.1@3732.05,2111.05 cw(c3720.1,2099.1) 3737,2099.1 cw(c3753.9,2099.1) H2'.1@3741.95,2111.05
NetH2'_4: H2'.4 R79.1 | length 513.6
  Bottom Layer w10: H2'.4@3582.05,2111.05 cw(c3570.1,2099.1) 3587,2099.1 cw(c3603.9,2099.1) H2'.4@3591.95,2111.05 ; H2'.4@3587,2144 3587,2078 ; 3602.86,2062.14 cw(c3535.83,1995.11) R79.1@3630.49,1990.04 ; 3618.72,2046.28 cw(c3565.93,1993.5) R79.1@3640.48,1989.51 ; R79.1@3620.5,1990.58 ccw(c3505.73,1996.72) 3587,2078 ; 3634.58,2030.42 cw(c3596.04,1991.89) R79.1@3650.46,1988.97 ; R79.1@3638.31,2010.91 ccw(c3635.49,2020) 3645,2020 ; R79.1@3645,1989.37 3645,2020 ; R79.1@3651.69,2010.91 cw(c3654.51,2020) 3645,2020 ; 3587,2078 3645,2020
NetH2'_5: H2'.5 R80.1 | length 315.6
  Bottom Layer w10: R80.1@3522.08,2005.32 ccw(c3486.06,2041.34) 3537,2041.34 ; R80.1@3529.15,1998.25 ccw(c3510.2,2017.2) 3537,2017.2 ; H2'.5@3532.05,2111.05 cw(c3520.1,2099.1) 3537,2099.1 cw(c3553.9,2099.1) H2'.5@3541.95,2111.05 ; 3537,2022.18 ccw(c3570.84,2022.18) R80.1@3546.91,1998.25 ; 3537,2046.32 ccw(c3594.98,2046.32) R80.1@3553.98,2005.32 ; H2'.5@3537,2144 3537,1992.37 R80.1@3540,1989.37
NetH2'_6: H2'.6 R81.1 | length 321.6
  Bottom Layer w10: R81.1@3419.92,2006.14 ccw(c3389.47,2040) 3435,2040 ; R81.1@3426.6,1998.71 ccw(c3409.65,2017.55) 3435,2017.55 ccw(c3460.35,2017.55) R81.1@3443.4,1998.71 ; R81.1@3435,1989.37 3435,2040 ; R81.1@3450.08,2006.14 cw(c3480.53,2040) 3435,2040 ; H2'.6@3482.05,2111.05 cw(c3470.1,2099.1) 3487,2099.1 cw(c3503.9,2099.1) H2'.6@3491.95,2111.05 ; H2'.6@3487,2144 3487,2092 3435,2040
NetH2'_15: H2'.15 R82.2 | length 1698.8
  Top Layer w10: v1@3365,1645 cw(c3365,1632.93) 3373.54,1641.46 cw(c3382.07,1650) 3370,1650 v1(3365,1650) ; v1@3366.29,1645.17 cw(c3369.42,1633.51) 3375.45,1643.96 cw(c3381.49,1654.42) v1@3369.83,1651.29 ; 3378.79,1636.21 ccw(c3417.42,1674.84) R82.2@3426.26,1620.93 ; 3392.57,1622.43 ccw(c3421.3,1651.16) R82.2@3427.87,1611.06 ; R82.2@3424.64,1630.8 cw(c3413.53,1698.53) v1(3365,1650) ; R82.2@3430.19,1608.03 3408.82,1613.13 3401.87,1613.13 v1(3365,1650)
  Bottom Layer w10: v1@3360,1650 ccw(c3347.93,1650) 3356.46,1658.54 ccw(c3365,1667.07) v1@3365,1655 ; v1@3370,1650 v1(3365,1650) 3350,1665 3350,2490 3420,2560 3620,2560 3687,2493 H2'.15@3687,2364 ; H2'.15@3682.05,2396.95 ccw(c3670.1,2408.9) 3687,2408.9 ccw(c3703.9,2408.9) H2'.15@3691.95,2396.95
NetH2_1: H2.1 R70.1 | length 1197.9
  Top Layer w10: v1(4145,1510) R70.1@4250.19,1536.97 ; v1@4147.55,1514.3 ccw(c4153.69,1524.69) 4156.69,1513 ccw(c4159.69,1501.31) v1@4149.3,1507.45 ; 4195.48,1522.94 cw(c4209.02,1470.12) R70.1@4236.8,1517.05 ; 4195.58,1522.97 ccw(c4182.07,1575.65) R70.1@4228.87,1547.95 ; 4218.86,1528.94 cw(c4226.41,1499.5) R70.1@4241.89,1525.65 ; 4218.96,1528.96 ccw(c4211.45,1558.26) R70.1@4237.48,1542.86
  Bottom Layer w10: v1@4141.46,1506.46 ccw(c4132.93,1497.93) 4132.93,1510 ccw(c4132.93,1522.07) v1@4141.46,1513.54 ; v1(4145,1510) 4125,1510 4085,1470 4040,1470 3985,1525 3985,1643.64 4045,1703.64 4045,1780 4162,1897 H2.1@4162,2144 ; H2.1@4157.05,2111.05 cw(c4145.1,2099.1) 4162,2099.1 cw(c4178.9,2099.1) H2.1@4166.95,2111.05
NetH2_2: H2.2 R71.1 | length 1268.9
  Top Layer w10: v1(4095,1360) R71.1@4214.81,1336.97 ; v1@4097.8,1355.86 cw(c4104.58,1345.87) 4106.85,1357.72 cw(c4109.13,1369.58) v1@4099.14,1362.8 ; 4159.06,1347.69 ccw(c4169.43,1401.64) R71.1@4200.25,1356.16 ; 4159.73,1347.56 cw(c4149.55,1294.55) R71.1@4194.23,1324.83 ; 4182.77,1343.13 ccw(c4188.59,1373.38) R71.1@4205.86,1347.88 ; 4183.44,1343 cw(c4177.81,1313.7) R71.1@4202.51,1330.44
  Bottom Layer w10: v1@4091.46,1356.46 ccw(c4082.93,1347.93) 4082.93,1360 ccw(c4082.93,1372.07) v1@4091.46,1363.54 ; v1(4095,1360) 4030,1360 3950,1440 3950,1636.92 4025,1711.92 4025,1800 4112,1887 H2.2@4112,2144 ; H2.2@4107.05,2111.05 cw(c4095.1,2099.1) 4112,2099.1 cw(c4128.9,2099.1) H2.2@4116.95,2111.05
NetH2_3: H2.3 R72.1 | length 1328
  Top Layer w10: v1@3999.84,1255 cw(c3999.46,1242.94) 4008.26,1251.2 cw(c4017.06,1259.46) v1@4005,1259.84 ; v1(4000,1260) R72.1@4087.16,1167.16 ; 4048.43,1208.41 cw(c4008.57,1170.99) R72.1@4063.22,1169.26 ; 4048.64,1208.19 ccw(c4088.19,1245.32) R72.1@4086.48,1191.1 ; 4064.96,1190.81 cw(c4042.7,1169.91) R72.1@4073.22,1168.95 ; 4065.16,1190.59 ccw(c4087.11,1211.2) R72.1@4086.17,1181.11
  Bottom Layer w10: v1@3996.46,1256.46 ccw(c3987.93,1247.93) 3987.93,1260 ccw(c3987.93,1272.07) v1@3996.46,1263.54 ; v1(4000,1260) 3975,1260 3905,1330 3905,1723.64 4062,1880.64 H2.3@4062,2144 ; H2.3@4057.05,2111.05 cw(c4045.1,2099.1) 4062,2099.1 cw(c4078.9,2099.1) H2.3@4066.95,2111.05
NetH2_4: H2.4 R73.1 | length 1342.1
  Top Layer w10: v1@3862.59,1195.62 cw(c3856.77,1185.04) 3868.36,1188.41 cw(c3879.96,1191.77) v1@3869.38,1197.59 ; v1(3865,1200) R73.1@3896.97,1089.81 ; R73.1@3876.7,1102.59 ccw(c3829.1,1128.77) 3881.27,1143.91 ; 3881.22,1144.1 ccw(c3933.66,1159.31) R73.1@3907.34,1111.48 ; R73.1@3885.46,1097.77 ccw(c3859.02,1112.32) 3888,1120.73 ; 3887.95,1120.91 ccw(c3917.2,1129.4) R73.1@3902.52,1102.72
  Bottom Layer w10: v1@3860,1200 ccw(c3847.93,1200) 3856.46,1208.54 ccw(c3865,1217.07) v1@3865,1205 ; v1(3865,1200) 3835,1230 3835,1290 3880,1335 3880,1740 4012,1872 H2.4@4012,2144 ; H2.4@4007.05,2111.05 cw(c3995.1,2099.1) 4012,2099.1 cw(c4028.9,2099.1) H2.4@4016.95,2111.05
NetH2_5: H2.5 R74.1 | length 1335.1
  Top Layer w10: R74.1@3680.77,1131.37 ccw(c3652.57,1177.79) 3705.33,1164.91 ; R74.1@3685.96,1122.82 ccw(c3670.29,1148.61) 3699.6,1141.45 ; R74.1@3691.97,1110.19 v1(3720,1225) ; 3699.65,1141.66 ccw(c3729.26,1134.43) R74.1@3703.21,1118.61 ; 3705.38,1165.11 ccw(c3758.43,1152.16) R74.1@3711.76,1123.8 ; v1@3715.73,1222.4 cw(c3705.41,1216.14) 3717.14,1213.27 cw(c3728.86,1210.41) v1@3722.6,1220.73
  Bottom Layer w10: v1@3716.46,1228.54 ccw(c3707.93,1237.07) 3720,1237.07 ccw(c3732.07,1237.07) v1@3723.54,1228.54 ; v1(3720,1225) 3720,1290 3785,1355 3785,1771.21 3962,1948.21 H2.5@3962,2144 ; H2.5@3957.05,2111.05 cw(c3945.1,2099.1) 3962,2099.1 cw(c3978.9,2099.1) H2.5@3966.95,2111.05
NetH2_6: H2.6 R75.1 | length 1286.9
  Top Layer w10: R75.1@3512.16,1217.84 v1(3590,1305) ; R75.1@3512.28,1241.75 ccw(c3509.23,1295.75) 3549.57,1259.73 ; R75.1@3512.84,1231.77 ccw(c3511.16,1261.66) 3533.49,1241.72 ; R75.1@3526.09,1219.94 cw(c3556.74,1221.67) 3533.84,1242.12 ; R75.1@3536.08,1220.5 cw(c3590.83,1223.6) 3549.93,1260.13 ; v1@3585.01,1304.72 cw(c3572.96,1304.04) 3581.96,1296 cw(c3590.96,1287.96) v1@3590.28,1300.01
  Bottom Layer w10: v1(3590,1305) 3760,1475 3760,1795 3912,1947 H2.6@3912,2144 ; v1@3590,1310 ccw(c3590,1322.07) 3598.54,1313.54 ccw(c3607.07,1305) v1@3595,1305 ; H2.6@3907.05,2111.05 cw(c3895.1,2099.1) 3912,2099.1 cw(c3928.9,2099.1) H2.6@3916.95,2111.05
NetH2_7: H2.7 R76.1 | length 1268.2
  Top Layer w10: R76.1@3419.81,1388.03 v1(3543.03,1428.03) ; R76.1@3427.42,1399.73 ccw(c3441.03,1426.43) 3450.28,1397.92 ; R76.1@3431.96,1408.64 ccw(c3456.54,1456.84) 3473.25,1405.38 ; R76.1@3432.9,1382.83 cw(c3460.22,1368.9) 3450.75,1398.07 ; R76.1@3441.81,1378.29 cw(c3490.64,1353.39) 3473.72,1405.53 ; v1@3538.57,1430.3 cw(c3527.82,1435.78) 3531.55,1424.3 cw(c3535.27,1412.82) v1@3540.76,1423.57
  Bottom Layer w10: v1(3543.03,1428.03) 3575,1460 3670,1460 3705,1495 3705,1640 3660,1685 3660,1750 3862,1952 H2.7@3862,2144 ; v1@3543.03,1433.03 ccw(c3543.03,1445.1) 3551.56,1436.56 ccw(c3560.1,1428.03) v1@3548.03,1428.03 ; H2.7@3857.05,2111.05 cw(c3845.1,2099.1) 3862,2099.1 cw(c3878.9,2099.1) H2.7@3866.95,2111.05
NetH2_15: H2.15 R77.2 | length 913.7
  Top Layer w10: R77.2@4187.84,1732.16 4250,1794.32 v1(4250,1800) ; R77.2@4189.23,1746.11 ccw(c4189.23,1776.43) 4210.67,1754.99 ccw(c4232.11,1733.55) R77.2@4201.79,1733.55 ; R77.2@4189.23,1756.11 ccw(c4189.23,1810.57) 4227.74,1772.06 ccw(c4266.25,1733.55) R77.2@4211.79,1733.55 ; 4237.45,1781.77 ccw(c4219.22,1800) v1@4245,1800
  Bottom Layer w10: H2.15@4107.05,2331.05 cw(c4095.1,2319.1) 4112,2319.1 cw(c4128.9,2319.1) H2.15@4116.95,2331.05 ; H2.15@4112,2364 4112,2288 4250,2150 v1(4250,1800) ; v1@4246.46,1803.54 ccw(c4237.93,1812.07) 4250,1812.07 ccw(c4262.07,1812.07) v1@4253.54,1803.54
NetH3'_1: H3'.1 R91.1 | length 760.9
  Top Layer w10: R91.1@4557.84,1792.84 v1(4605,1840) ; R91.1@4557.84,1805.4 ccw(c4557.84,1835.72) 4579.28,1814.28 ccw(c4600.72,1792.84) R91.1@4570.4,1792.84 ; R91.1@4557.84,1815.4 ccw(c4557.84,1869.86) 4596.35,1831.35 ccw(c4634.86,1792.84) R91.1@4580.4,1792.84 ; 4589.51,1827.4 ccw(c4578.07,1847.22) v1@4600.17,1841.29 ; 4592.4,1824.51 cw(c4612.22,1813.07) v1@4606.29,1835.17 ; 4594.77,1830.44 ccw(c4589.53,1839.51) v1@4600,1839.84 ; 4595.44,1829.77 cw(c4604.51,1824.53) v1@4604.84,1835 ; v1@4600,1840 cw(c4587.93,1840) 4596.46,1831.46 cw(c4605,1822.93) v1@4605,1835
  Bottom Layer w10: v1(4605,1840) 4700,1840 4782,1922 H3'.1@4782,2149 ; v1@4608.54,1836.46 cw(c4617.07,1827.93) 4617.07,1840 cw(c4617.07,1852.07) v1@4608.54,1843.54 ; H3'.1@4777.05,2116.05 cw(c4765.1,2104.1) 4782,2104.1 cw(c4798.9,2104.1) H3'.1@4786.95,2116.05
NetH3'_2: H3'.2 R92.1 | length 1137.4
  Bottom Layer w10: H3'.2@4732,2149 4732,2187 4755,2210 5345,2210 5370,2185 5370,1934.37 R92.1@5425,1879.37 ; 5383.13,1921.24 cw(c5341.26,1879.37) R92.1@5400.47,1879.37 ; 5387.88,1916.49 ccw(c5423.03,1951.64) R92.1@5423.03,1901.93 ; R92.1@5400.2,1904.17 cw(c5375.4,1879.37) R92.1@5410.47,1879.37
NetH3'_3: H3'.3 R93.1 | length 824.7
  Bottom Layer w10: H3'.3@4682,2149 4675,2156 4675,2170 4735,2230 R93.1@5424.37,2230 ; H3'.3@4682,2184 ccw(c4682,2200.9) 4693.95,2188.95 ccw(c4705.9,2177) H3'.3@4689,2177
NetH3'_4: H3'.4 R94.1 | length 400.2
  Bottom Layer w10: H3'.4@4627.05,2116.05 cw(c4615.1,2104.1) 4632,2104.1 cw(c4648.9,2104.1) H3'.4@4636.95,2116.05 ; H3'.4@4632,2149 4632,2078 4690,2020 R94.1@4690,1999.37 ; 4633.54,2076.46 cw(c4556.45,1999.37) R94.1@4665.47,1999.37 ; 4650.61,2059.39 cw(c4590.6,1999.37) R94.1@4675.47,1999.37 ; 4667.68,2042.32 cw(c4624.74,1999.37) R94.1@4685.47,1999.37
NetH3'_5: H3'.5 R95.1 | length 305.4
  Bottom Layer w10: R95.1@4569.05,2015.32 ccw(c4530.54,2053.83) 4585,2053.83 ccw(c4639.46,2053.83) R95.1@4600.95,2015.32 ; R95.1@4576.12,2008.25 ccw(c4554.68,2029.69) 4585,2029.69 ccw(c4615.32,2029.69) R95.1@4593.88,2008.25 ; H3'.5@4577.05,2116.05 cw(c4557.86,2096.86) 4585,2096.86 ; H3'.5@4582,2149 4585,2146 R95.1@4585,1999.37
NetH3'_6: H3'.6 R96.1 | length 383.3
  Bottom Layer w10: R96.1@4480,1999.37 4480,2020 4532,2072 ; R96.1@4484.52,1999.5 cw(c4538.11,2002.23) 4500.17,2040.17 ; R96.1@4494.51,2000.01 cw(c4568.39,2003.77) 4516.08,2056.08 ; R96.1@4504.5,2000.52 cw(c4598.68,2005.32) 4532,2072 ; H3'.6@4527.05,2116.05 cw(c4515.1,2104.1) 4532,2104.1 cw(c4548.9,2104.1) H3'.6@4536.95,2116.05 ; H3'.6@4532,2149 4532,2072
NetH3'_15: H3'.15 R97.2 | length 1475.8
  Top Layer w10: v2@4405,1661 cw(c4405,1639.27) 4420.36,1654.64 cw(c4435.73,1670) v2@4414,1670 ; v2(4405,1670) 4456.97,1618.03 R97.2@4460.19,1618.03
  Bottom Layer w10: v2@4396,1670 ccw(c4374.27,1670) 4389.64,1685.36 ccw(c4405,1700.73) v2@4405,1679 ; v2(4405,1670) 4345,1730 4345,2440 4405,2500 4675,2500 4732,2443 H3'.15@4732,2369 ; H3'.15@4727.05,2401.95 ccw(c4715.1,2413.9) 4732,2413.9 ccw(c4748.9,2413.9) H3'.15@4736.95,2401.95
NetH3_1: H3.1 R83.1 | length 1213.3
  Top Layer w10: v1(5140,1495) R83.1@5280.19,1536.97 ; v1@5142.37,1499.4 ccw(c5148.1,1510.03) 5151.56,1498.46 ccw(c5155.03,1486.9) v1@5144.4,1492.63 ; 5226,1520.75 ccw(c5210.32,1573.11) R83.1@5258.43,1547.17 ; 5226.26,1520.83 cw(c5241.83,1468.84) R83.1@5267.58,1516.61 ; 5249.13,1527.67 ccw(c5240.37,1556.9) R83.1@5267.23,1542.42 ; 5249.39,1527.75 cw(c5258.03,1498.89) R83.1@5272.33,1525.41
  Bottom Layer w10: v1(5140,1495) 5115,1470 5060,1470 5010,1520 5010,1643.64 5085,1718.64 5085,1785 5247,1947 H3.1@5247,2149 ; H3.1@5242.05,2116.05 cw(c5230.1,2104.1) 5247,2104.1 cw(c5263.9,2104.1) H3.1@5251.95,2116.05
NetH3_2: H3.2 R84.1 | length 1297.5
  Top Layer w10: v1(5115,1360) R84.1@5244.81,1321.97 ; v1@5117.4,1355.61 cw(c5123.19,1345.02) 5126.58,1356.61 cw(c5129.98,1368.19) v1@5119.39,1362.4 ; 5190.55,1337.87 cw(c5175.2,1285.45) R84.1@5223.12,1311.66 ; 5190.76,1337.81 ccw(c5206.03,1389.92) R84.1@5232.09,1342.27 ; 5213.72,1331.08 cw(c5205.15,1301.83) R84.1@5231.89,1316.46 ; 5213.93,1331.02 ccw(c5222.41,1359.97) R84.1@5236.88,1333.5
  Bottom Layer w10: v1@5111.46,1356.46 ccw(c5102.93,1347.93) 5102.93,1360 ccw(c5102.93,1372.07) v1@5111.46,1363.54 ; v1(5115,1360) 5050,1360 4990,1420 4990,1651.92 5055,1716.92 5055,1800 5197,1942 H3.2@5197,2149 ; H3.2@5192.05,2116.05 cw(c5180.1,2104.1) 5197,2104.1 cw(c5213.9,2104.1) H3.2@5201.95,2116.05
NetH3_3: H3.3 R85.1 | length 1378.8
  Top Layer w10: v1(5030,1240) R85.1@5112.16,1167.16 ; v1@5030.3,1235.01 cw(c5031.02,1222.96) 5039.03,1231.99 cw(c5047.04,1241.02) v1@5034.99,1240.3 ; 5069.72,1204.78 ccw(c5106.12,1245.84) R85.1@5109.41,1191.07 ; 5070.15,1204.4 cw(c5034.29,1163.95) R85.1@5088.25,1167.2 ; 5087.79,1188.77 ccw(c5108.17,1211.76) R85.1@5110.02,1181.09 ; 5088.22,1188.39 cw(c5068.37,1166) R85.1@5098.23,1167.8
  Bottom Layer w10: 5004.39,1255.61 ccw(c5030,1281.21) v1@5030,1245 ; 5019.57,1240.68 ccw(c5019.57,1250.43) v1@5026.46,1243.54 ; v1@5025.85,1237.21 ccw(c5019.32,1232.8) 5019.32,1240.68 ; v1@5030.68,1240.68 5019.32,1240.68 ; H3.3@5142.05,2116.05 cw(c5130.1,2104.1) 5147,2104.1 cw(c5163.9,2104.1) H3.3@5151.95,2116.05 ; H3.3@5147,2149 5147,1942 4930,1725 4930,1330 5019.32,1240.68
NetH3_4: H3.4 R86.1 | length 1375.5
  Top Layer w10: v1@4892.77,1195.52 cw(c4887.4,1184.72) 4898.84,1188.56 cw(c4910.28,1192.4) v1@4899.48,1197.77 ; v1(4895,1200) R86.1@4931.97,1089.81 ; R86.1@4911.26,1101.76 ccw(c4862.88,1125.84) 4914.12,1143.03 ; 4913.93,1143.59 ccw(c4965.96,1161.04) R86.1@4941.51,1111.91 ; R86.1@4920.22,1097.31 ccw(c4893.44,1110.63) 4921.8,1120.14 ; 4921.61,1120.7 ccw(c4950.75,1130.47) R86.1@4937.06,1102.96
  Bottom Layer w10: v1@4890,1200 ccw(c4877.93,1200) 4886.46,1208.54 ccw(c4895,1217.07) v1@4895,1205 ; v1(4895,1200) 4860,1235 4860,1295 4910,1345 4910,1733.28 5097,1920.28 H3.4@5097,2149 ; H3.4@5092.05,2116.05 cw(c5080.1,2104.1) 5097,2104.1 cw(c5113.9,2104.1) H3.4@5101.95,2116.05
NetH3_5: H3.5 R87.1 | length 1407.8
  Top Layer w10: R87.1@4710.32,1126.09 ccw(c4681.14,1171.71) 4734.03,1160.09 ; R87.1@4715.71,1117.67 ccw(c4699.54,1142.95) 4728.85,1136.51 ; R87.1@4721.97,1105.19 v1(4745,1210) ; 4728.95,1136.94 ccw(c4758.86,1130.36) R87.1@4733.06,1113.86 ; 4734.13,1160.51 ccw(c4787.62,1148.76) R87.1@4741.48,1119.25 ; v1@4740.79,1207.31 cw(c4730.62,1200.8) 4742.41,1198.21 cw(c4754.2,1195.62) v1@4747.69,1205.79
  Bottom Layer w10: v1@4741.46,1213.54 ccw(c4732.93,1222.07) 4745,1222.07 ccw(c4757.07,1222.07) v1@4748.54,1213.54 ; v1(4745,1210) 4745,1295 4805,1355 4805,1766.21 4843.79,1805 4910,1805 5047,1942 H3.5@5047,2149 ; H3.5@5042.05,2116.05 cw(c5030.1,2104.1) 5047,2104.1 cw(c5063.9,2104.1) H3.5@5051.95,2116.05
NetH3_6: H3.6 R88.1 | length 1430.7
  Top Layer w10: R88.1@4537.16,1217.84 4537.16,1225.8 v1(4618.18,1306.82) ; R88.1@4538.55,1241.79 ccw(c4538.55,1277.03) 4563.47,1252.11 ; R88.1@4551.11,1219.23 cw(c4600.65,1219.23) 4565.62,1254.26 ; R88.1@4561.11,1219.23 cw(c4634.8,1219.23) 4582.69,1271.33 ; v1@4613.18,1306.82 cw(c4601.11,1306.82) 4609.64,1298.28 cw(c4618.18,1289.75) v1@4618.18,1301.82
  Bottom Layer w10: v1@4613.18,1306.82 cw(c4628.54,1306.82) 4617.68,1317.68 ; v1@4614.8,1310.51 ccw(c4607.78,1318.18) 4618.18,1318.18 ; v1(4618.18,1306.82) 4618.18,1318.18 ; v1@4621.56,1310.51 cw(c4628.58,1318.18) 4618.18,1318.18 ; v1@4623.18,1306.82 cw(c4662.68,1306.82) 4634.75,1334.75 ; H3.6@4992.05,2116.05 cw(c4980.1,2104.1) 4997,2104.1 cw(c5013.9,2104.1) H3.6@5001.95,2116.05 ; H3.6@4997,2149 4997,1937 4885,1825 4835.5,1825 4785,1774.5 4785,1400 4760,1375 4675,1375 4618.18,1318.18
NetH3_7: H3.7 R89.1 | length 1287.6
  Top Layer w10: R89.1@4459.81,1393.03 v1(4575,1430) ; R89.1@4467.45,1404.71 ccw(c4481.17,1431.38) 4490.33,1402.82 ; R89.1@4472.03,1413.6 ccw(c4496.77,1461.75) 4513.32,1410.2 ; R89.1@4472.88,1387.8 cw(c4500.14,1373.78) 4490.77,1402.97 ; R89.1@4481.78,1383.22 cw(c4530.5,1358.18) 4513.76,1410.34 ; v1@4570.55,1432.29 cw(c4559.82,1437.8) 4563.51,1426.31 cw(c4567.2,1414.82) v1@4572.71,1425.55
  Bottom Layer w10: v1(4575,1430) 4610,1465 4710,1465 4735,1490 4735,1640 4690,1685 4690,1730 4947,1987 H3.7@4947,2149 ; v1@4575,1435 ccw(c4575,1447.07) 4583.54,1438.54 ccw(c4592.07,1430) v1@4580,1430 ; H3.7@4942.05,2116.05 cw(c4930.1,2104.1) 4947,2104.1 cw(c4963.9,2104.1) H3.7@4951.95,2116.05